# EAGLE board test_module (EAGLE 9.6.2)

Size 91.44 x 93.98 mm. Coordinates in mm from the lower left corner, seen from the top.
Outline: 0,0 91.44,0 91.44,93.98 0,93.98 0,0
Copper layers (1*16): Top 0.035mm / dielectric 1.5mm / Bottom 0.035mm
Design rules "SparkFun *": minimum track width 6mil, minimum drill 20mil, track to track 6mil, track to pad 6mil, pad to pad 6mil, via to via 6mil, smd to smd 6mil, copper to edge 10mil, drill to drill 8mil, minimum pad ring 12mil, minimum via ring 10mil, stop-mask expansion 4mil, vias tented up to drill 25mil, thermal gap 10mil

## Footprints (pad centres in the part's own frame; a part is rotated, then mirrored left to right if it is on the bottom)
0603 = smd 1.1 x 1: 1 -0.85,0; 2 0.85,0
5-PIN-EDGE-CONNECTOR = smd 4 x 1: P$1 -0.032,2.951; P$2 -0.032,1.451; P$3 -0.032,-0.049; P$4 -0.032,-1.549; P$5 -0.032,-3.049
SOP65P780X200-20N = smd 1.8 x 0.45: 1 -3.55,2.925; 2 -3.55,2.275; 3 -3.55,1.625; 4 -3.55,0.975; 5 -3.55,0.325; 6 -3.55,-0.325; 7 -3.55,-0.975; 8 -3.55,-1.625; 9 -3.55,-2.275; 10 -3.55,-2.925; 11 3.55,-2.925; 12 3.55,-2.275; 13 3.55,-1.625; 14 3.55,-0.975; 15 3.55,-0.325; 16 3.55,0.325; 17 3.55,0.975; 18 3.55,1.625; 19 3.55,2.275; 20 3.55,2.925
SOT95P280X145-6N = smd 1.21 x 0.58: 1 -1.255,0.95; 2 -1.255,0; 3 -1.255,-0.95; 4 1.255,-0.95; 5 1.255,0; 6 1.255,0.95
SOIC8_4P9X3P9MC_MCH = smd 1.981 x 0.559: 1 -2.464,1.905; 2 -2.464,0.635; 3 -2.464,-0.635; 4 -2.464,-1.905; 5 2.464,-1.905; 6 2.464,-0.635; 7 2.464,0.635; 8 2.464,1.905
WS2812B_WDS = smd 1.295 x 0.991: 1 -2.438,1.65; 2 -2.438,-1.65; 3 2.438,-1.65; 4 2.438,1.65
QFN24_4X4_MCH = smd 0.813 x 0.254: 1 -1.968,1.27; 2 -1.968,0.762; 3 -1.968,0.254; 4 -1.968,-0.254; 5 -1.968,-0.762; 6 -1.968,-1.27; 13 1.968,-1.27; 14 1.968,-0.762; 15 1.968,-0.254; 16 1.968,0.254; 17 1.968,0.762; 18 1.968,1.27 | smd 0.254 x 0.813: 7 -1.27,-1.968; 8 -0.762,-1.968; 9 -0.254,-1.968; 10 0.254,-1.968; 11 0.762,-1.968; 12 1.27,-1.968; 19 1.27,1.968; 20 0.762,1.968; 21 0.254,1.968; 22 -0.254,1.968; 23 -0.762,1.968; 24 -1.27,1.968 | smd 2.591 x 2.591: 25 0,0

## Placement (x,y rotation side)
C1  0.1uF  [0603]  38.1,38.1 90 top
C2  0.1uF  [0603]  54.61,48.26 90 top
C3  0.1uF  [0603]  41.91,38.1 90 top
C4  0.1uF  [0603]  58.42,43.18 90 top
C5  0.1uF  [0603]  58.42,38.1 90 top
C6  0.1uF  [0603]  54.61,43.18 90 top
C7  0.1uF  [0603]  54.61,38.1 90 top
E1  5-PIN-EDGE-CONNECTOR  [5-PIN-EDGE-CONNECTOR]  67.31,90.17 90 top
E2  5-PIN-EDGE-CONNECTOR  [5-PIN-EDGE-CONNECTOR]  24.13,90.17 90 top
E3  5-PIN-EDGE-CONNECTOR  [5-PIN-EDGE-CONNECTOR]  3.81,69.85 0 top
E4  5-PIN-EDGE-CONNECTOR  [5-PIN-EDGE-CONNECTOR]  3.81,24.13 0 top
E5  5-PIN-EDGE-CONNECTOR  [5-PIN-EDGE-CONNECTOR]  67.31,85.09 270 bottom
E6  5-PIN-EDGE-CONNECTOR  [5-PIN-EDGE-CONNECTOR]  24.13,85.09 270 bottom
E7  5-PIN-EDGE-CONNECTOR  [5-PIN-EDGE-CONNECTOR]  8.89,69.85 0 bottom
E8  5-PIN-EDGE-CONNECTOR  [5-PIN-EDGE-CONNECTOR]  82.55,69.85 0 bottom
E9  5-PIN-EDGE-CONNECTOR  [5-PIN-EDGE-CONNECTOR]  82.55,24.13 0 bottom
E10  5-PIN-EDGE-CONNECTOR  [5-PIN-EDGE-CONNECTOR]  8.89,24.13 0 bottom
E11  5-PIN-EDGE-CONNECTOR  [5-PIN-EDGE-CONNECTOR]  67.31,8.89 270 bottom
E12  5-PIN-EDGE-CONNECTOR  [5-PIN-EDGE-CONNECTOR]  24.13,8.89 270 bottom
E13  5-PIN-EDGE-CONNECTOR  [5-PIN-EDGE-CONNECTOR]  24.13,3.81 90 top
E14  5-PIN-EDGE-CONNECTOR  [5-PIN-EDGE-CONNECTOR]  87.63,69.85 0 top
E15  5-PIN-EDGE-CONNECTOR  [5-PIN-EDGE-CONNECTOR]  67.31,3.81 90 top
E16  5-PIN-EDGE-CONNECTOR  [5-PIN-EDGE-CONNECTOR]  87.63,24.13 0 top
FRAME1  FRAME-LEDGER  [CREATIVE_COMMONS]  22.86,-12.7 0 top  (outside the outline)
IC1  ATTINY426-XUR  [SOP65P780X200-20N]  38.1,46.99 0 top
U1  SN74LVC1G18DBVR  [SOT95P280X145-6N]  38.1,60.96 0 top
U2  ATTINY402-SSNR  [SOIC8_4P9X3P9MC_MCH]  48.26,38.86 90 top
U3  WS2812B  [WS2812B_WDS]  22.86,71.12 180 bottom
U4  ATTINY1607-MFR  [QFN24_4X4_MCH]  48.26,48.26 0 top
U5  SN74LVC1G18DBVR  [SOT95P280X145-6N]  45.72,60.96 0 top
U6  SN74LVC1G18DBVR  [SOT95P280X145-6N]  53.34,60.96 0 top
U7  SN74LVC1G18DBVR  [SOT95P280X145-6N]  45.72,55.88 0 top
U8  SN74LVC1G3157DBVR  [SOT95P280X145-6N]  38.1,55.88 0 top
U12  WS2812B  [WS2812B_WDS]  22.86,22.86 0 bottom
U13  WS2812B  [WS2812B_WDS]  68.58,22.86 0 bottom
U14  WS2812B  [WS2812B_WDS]  68.58,71.12 180 bottom
U16  SN74LVC1G3157DBVR  [SOT95P280X145-6N]  53.34,55.88 0 top

## Library data of the parts
C1-C7 = SparkFun-Capacitors; PROD_ID: CAP-16503
E1-E16 = EDGE-CONNECTORS
FRAME1 = SparkFun-Aesthetics
IC1 = ATTINY426-XUR; DESCRIPTION: 8-bit Microcontrollers - MCU 20MHz, 4KB, SSOP20, Ind 85C, Green, T&R; HEIGHT: 2mm; MANUFACTURER_NAME: Microchip; MANUFACTURER_PART_NUMBER: ATTINY426-XUR; MOUSER_PART_NUMBER: 579-ATTINY426-XUR; MOUSER_PRICE-STOCK: https://www.mouser.co.uk/ProductDetail/Microchip-Technology/ATTINY426-XUR?qs=pUKx8fyJudDqk85TWghK0w%3D%3D
U1 U5-U7 = SN74LVC1G18DBVR; AVAILABILITY: In Stock; CHECK_PRICES: https://www.snapeda.com/parts/SN74LVC1G18DBVR/Texas+Instruments/view-part/?ref=eda; DESCRIPTION: One of Two Noninverting Demultiplexer with 3-State Deselected Output; MF: Texas Instruments; MP: SN74LVC1G18DBVR; PACKAGE: SOT-23-6 Texas Instruments; PRICE: None; PURCHASE-URL: https://www.snapeda.com/api/url_track_click_mouser/?unipart_id=411270&manufacturer=Texas Instruments&part_name=SN74LVC1G18DBVR&search_term=None; SNAPEDA_LINK: https://www.snapeda.com/parts/SN74LVC1G18DBVR/Texas+Instruments/view-part/?ref=snap
U2 = ATTINY402-SSNR; COPYRIGHT: Copyright (C) 2024 Ultra Librarian. All rights reserved.; MANUFACTURER_PART_NUMBER: ATTINY402-SSNR; MFR_NAME: Microchip
U3 U12-U14 = WS2812B; COPYRIGHT: Copyright (C) 2024 Ultra Librarian. All rights reserved.; MANUFACTURER_PART_NUMBER: WS2812B; MFR_NAME: Worldsemi
U4 = ATTINY1607-MFR; COPYRIGHT: Copyright (C) 2024 Ultra Librarian. All rights reserved.; DIGIKEY_PART_NUMBER_1: ATTINY1607-MFRCT-ND; DIGIKEY_PART_NUMBER_2: ATTINY1607-MFRDKR-ND; DIGIKEY_PART_NUMBER_3: ATTINY1607-MFRTR-ND; MANUFACTURER_PART_NUMBER: ATTINY1607-MFR; MFR_NAME: Microchip
U8 U16 = SN74LVC1G3157DBVR; AVAILABILITY: In Stock; CHECK_PRICES: https://www.snapeda.com/parts/SN74LVC1G3157DBVR/Texas+Instruments/view-part/?ref=eda; DESCRIPTION: 5-V, 2:1 (SPDT), 1-channel general-purpose analog switch; MF: Texas Instruments; MP: SN74LVC1G3157DBVR; PACKAGE: SOT-23-6 Texas Instruments; PRICE: None; PURCHASE-URL: https://www.snapeda.com/api/url_track_click_mouser/?unipart_id=366071&manufacturer=Texas Instruments&part_name=SN74LVC1G3157DBVR&search_term=None; SNAPEDA_LINK: https://www.snapeda.com/parts/SN74LVC1G3157DBVR/Texas+Instruments/view-part/?ref=snap

## Nets
BUSY: IC1.7
CLK: IC1.3 U1.4
DBG_CORE: IC1.16 U6.4
DBG_EN: U1.1 U4.14
DBG_MAIN: U5.4
DBG_RGB: U6.6 U16.3
DBG_SL0: U4.13 U5.1
DBG_SL1: U4.12 U6.1 U16.6
GND: C1.2 C2.2 C3.2 C4.2 C5.2 C6.2 C7.2 E5.P$1 E5.P$5 E6.P$1 E6.P$5 E7.P$1 E7.P$5 E8.P$1 E8.P$5 E9.P$1 E9.P$5 E10.P$1 E10.P$5 E11.P$1 E11.P$5 E12.P$1 E12.P$5 IC1.20 U1.2 U2.8 U3.3 U4.3 U4.25 U5.2 U7.2 U8.2 U12.3 U13.3 U14.3 U16.2
INT: E1.P$3 E2.P$3 E3.P$3 E4.P$3 E13.P$3 E14.P$3 E15.P$3 E16.P$3 U8.4
INT_RO: IC1.5 U8.3
INT_RWM: U4.11 U8.6
INT_WO: IC1.4 U8.1
MAIN_DBG: U4.23
MISO: IC1.18 U2.5 U4.1
MOSI: IC1.17 U2.4 U4.24
N$1: U12.2 U13.4
N$2: U13.2 U14.4
N$3: U3.4 U14.2
N$4: U1.6 U5.3
N$5: U5.6 U6.3
PORT_0: IC1.15
PORT_1: IC1.14
PORT_2: IC1.13
PORT_3: IC1.12
PORT_4: IC1.11
PORT_5: IC1.10
PORT_6: IC1.9
PORT_7: IC1.8
RGB_CTRL: U2.2 U12.4
RGB_DBG_SS: U2.6 U16.4
SCK: IC1.19 U2.7 U4.2
SCL: E1.P$1 E1.P$5 E2.P$1 E2.P$5 E3.P$1 E3.P$5 E4.P$1 E4.P$5 E13.P$1 E13.P$5 E14.P$1 E14.P$5 E15.P$1 E15.P$5 E16.P$1 E16.P$5 U4.16
SDA: E1.P$2 E1.P$4 E2.P$2 E2.P$4 E3.P$2 E3.P$4 E4.P$2 E4.P$4 E13.P$2 E13.P$4 E14.P$2 E14.P$4 E15.P$2 E15.P$4 E16.P$2 E16.P$4 U4.15
SPI_SL: U4.17 U7.1
SS: U4.5 U7.3
SS_CORE: IC1.2 U7.4
SS_RGB: U7.6 U16.1
UPDI: E5.P$3 E6.P$3 E7.P$3 E8.P$3 E9.P$3 E10.P$3 E11.P$3 E12.P$3
UPDI/CLK: U1.3
VCC: C1.1 C2.1 C3.1 C4.1 C5.1 C6.1 C7.1 E5.P$2 E5.P$4 E6.P$2 E6.P$4 E7.P$2 E7.P$4 E8.P$2 E8.P$4 E9.P$2 E9.P$4 E10.P$2 E10.P$4 E11.P$2 E11.P$4 E12.P$2 E12.P$4 IC1.1 U1.5 U2.1 U3.1 U4.4 U5.5 U6.2 U6.5 U7.5 U8.5 U12.1 U13.1 U14.1 U16.5

## Tracks (layer width: path | path; a pad name or v marks a point on that pad's centre or on a via)
CLK  (1 unrouted)
DBG_CORE  (1 unrouted)
DBG_EN  (1 unrouted)
DBG_RGB  (1 unrouted)
DBG_SL0  (1 unrouted)
DBG_SL1  (2 unrouted)
GND  (35 unrouted)
INT  (8 unrouted)
INT_RO  (1 unrouted)
INT_RWM  (1 unrouted)
INT_WO  (1 unrouted)
MISO  (2 unrouted)
MOSI  (2 unrouted)
N$1  (1 unrouted)
N$2  (1 unrouted)
N$3  (1 unrouted)
N$4  (1 unrouted)
N$5  (1 unrouted)
RGB_CTRL  (1 unrouted)
RGB_DBG_SS  (1 unrouted)
SCK  (2 unrouted)
SCL  (16 unrouted)
SDA  (16 unrouted)
SPI_SL  (1 unrouted)
SS  (1 unrouted)
SS_CORE  (1 unrouted)
SS_RGB  (1 unrouted)
UPDI  (7 unrouted)
VCC  (36 unrouted)